# EAGLE board LCD _ serie (EAGLE 6.1)
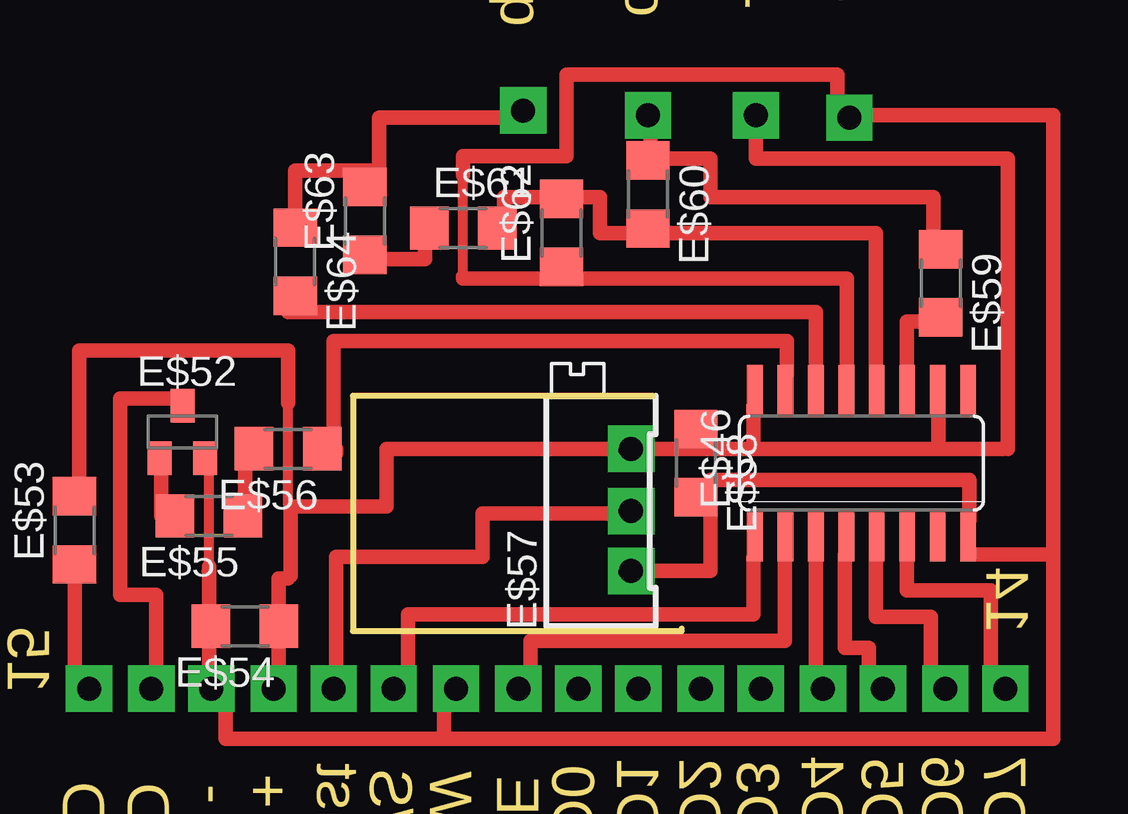
[diagram p0: board, top side]

Size 13.7 x 9.8 mm. Coordinates in mm from the lower left corner, seen from the top.
Outline: 12.5,9.8 0,9.8 0,0 13.7,0 13.7,0.1
Copper layers (1*16): Top 0.035mm / dielectric 1.5mm / Bottom 0.035mm
Design rules: minimum track width 10mil, minimum drill 24mil, track to track 8mil, track to pad 8mil, pad to pad 8mil, via to via 8mil, smd to smd 8mil, copper to edge 40mil, drill to drill 8mil, minimum pad ring 10mil, minimum via ring 8mil, stop-mask expansion 4mil, vias tented up to drill 0mil, thermal gap 10mil

## Footprints (pad centres in the part's own frame; a part is rotated, then mirrored left to right if it is on the bottom)
SO16 = smd 0.66 x 2.032: 1 -4.445,-3.073; 2 -3.175,-3.073; 3 -1.905,-3.073; 4 -0.635,-3.073; 5 0.635,-3.073; 6 1.905,-3.073; 7 3.175,-3.073; 8 4.445,-3.073; 9 4.445,3.073; 10 3.175,3.073; 11 1.905,3.073; 12 0.635,3.073; 13 -0.635,3.073; 14 -1.905,3.073; 15 -3.175,3.073; 16 -4.445,3.073
SOT23 = smd 1 x 1.4: 1 -0.95,-1.1; 2 0.95,-1.1; 3 0,1.1
R1206 = smd 1.6 x 1.803: 1 -1.422,0; 2 1.422,0
RTRIM64X = drill 0.61: 1 1.27,-2.54; 2 1.27,0; 3 1.27,2.54

## Placement (x,y rotation side)
E$46  595  [SO16]  21.2,7 0 top  (outside the outline)
E$52  [SOT23]  -7.1,8.3 0 top  (outside the outline)
E$53  33  [R1206]  -11.6,4.2 90 top  (outside the outline)
E$54  1uf  [R1206]  -4.5,0.2 180 top  (outside the outline)
E$55  1k  [R1206]  -6,4.8 180 top  (outside the outline)
E$56  1k  [R1206]  -2.7,7.6 180 top
E$57  [RTRIM64X]  10.1,5 0 top
E$58  100nf  [R1206]  14.3,7 270 top
E$59  470  [R1206]  24.5,14.5 270 top  (outside the outline)
E$60  1n4148  [R1206]  12.3,18.2 270 top  (outside the outline)
E$61  560pf  [R1206]  4.6,16.8 0 top  (outside the outline)
E$62  10k  [R1206]  8.7,16.6 90 top  (outside the outline)
E$63  1k  [R1206]  0.5,17.1 90 top  (outside the outline)
E$64  470  [R1206]  -2.4,15.4 270 top  (outside the outline)

## Library data of the parts
E$46 = 74xx-eu
E$52 = transistor
E$53-E$64 = ref-packages

## Tracks (layer width: path | path; a pad name or v marks a point on that pad's centre or on a via)
S$140  (via drill 1 pad 1.93)
  other vias: -5.9,-2.4
S$162
  Top 0.61: 3.8,-3.2 3.8,-4.5 | 3.8,-4.5 -5.3,-4.5 -5.3,-2.4 | 25.8,3.2 29.2,3.2 | 29.2,3.2 29.2,21.5 | 3.8,-4.5 29.2,-4.5 29.2,3.2
S$163  (via drill 1 pad 1.93)
  other vias: -11,-2.4
S$164  (via drill 1 pad 1.93)
  other vias: -8.4,-2.4
S$165  (via drill 1 pad 1.93)
  other vias: -3.3,-2.4
S$166  (via drill 1 pad 1.93)
  other vias: -0.8,-2.4
S$167  (via drill 1 pad 1.93)
  other vias: 1.7,-2.4
S$168  (via drill 1 pad 1.93)
  other vias: 4.3,-2.4
S$169  (via drill 1 pad 1.93)
  other vias: 6.9,-2.4
S$170  (via drill 1 pad 1.93)
  other vias: 9.4,-2.4
S$171  (via drill 1 pad 1.93)
  other vias: 11.9,-2.4
S$172  (via drill 1 pad 1.93)
  other vias: 14.5,-2.4
S$173  (via drill 1 pad 1.93)
  other vias: 17,-2.4
S$174  (via drill 1 pad 1.93)
  other vias: 19.6,-2.4
S$175  (via drill 1 pad 1.93)
  other vias: 22.1,-2.4
S$176  (via drill 1 pad 1.93)
  other vias: 24.7,-2.4
S$177  (via drill 1 pad 1.93)
  other vias: 27.2,-2.4
S$178
  Top 0.61: 23.1,3.2 23.1,1.7 26.6,1.7 26.6,-1.7
S$179
  Top 0.61: 21.8,3.4 21.8,0.6 24.1,0.6 24.1,-1.7
S$180
  Top 0.61: 21.5,-1.7 21.5,-0.7 20.5,-0.7 20.5,3.2
S$181
  Top 0.61: 19.3,-1.6 19.3,3.1
S$182
  Top 0.61: 7.4,-1.7 7.4,-0.4 18,-0.4 18,3.1
S$183
  Top 0.61: 2.3,-1.6 2.3,0.7 16.7,0.7 16.7,3.1
S$184
  Top 0.61: 25.7,7.6 27.1,7.6
S$185
  Top 0.61: -3,-2 -3.1,-2 -3.1,2.1
S$186
  Top 0.61: 16.7,9.4 16.7,7.6 | 16.7,7.6 24.4,7.6 | 24.4,7.6 24.4,9.3 | 24.4,7.6 25.6,7.6 | 16.7,7.6 1.4,7.6 1.4,5.2 -2.6,5.2 -2.6,2.3
S$187
  Top 0.61: -5.4,-1.9 -6,-1.9
S$188
  Top 0.61: -7.3,9.7 -9.7,9.7 -9.7,1.5 -8.2,1.5 -8.2,-1.6
S$189
  Top 0.61: -11.5,-1.9 -11.6,-1.9 -11.6,2.4
S$190
  Top 0.61: -3.1,2.2 -2.7,2.2
S$191
  Top 0.406: -2.7,5.3 -2.7,9.5
  Top 0.61: -11.3,6.2 -11.4,6.2 -11.4,11.7 -2.7,11.7 -2.7,9.5
S$192
  Top 0.61: -7.7,4.8 -8,4.8 -8,6.8
S$193
  Top 0.61: -4.5,7.3 -4.5,5.3
S$194
  Top 0.61: -0.7,7.4 -0.7,7.6
S$195
  Top 0.61: 18.1,10.7 18.1,12.1 15,12.1 14.9,12.1 -0.8,12.1 -0.8,8.2
S$196  (via drill 1 pad 1.93)
  other vias: 11.6,7.6
S$197  (via drill 1 pad 1.93)
  other vias: 11.6,5
S$198  (via drill 1 pad 1.93)
  other vias: 11.6,2.5
S$199
  Top 0.61: 11.3,4.9 5.4,4.9 5.4,3.1 -0.7,3.1 -0.7,-1.5
S$200
  Top 0.61: 25.7,4.6 25.7,6.3 14.9,6.3 14.9,2.5 12.4,2.5
S$201  (via drill 1 pad 1.93)
  other vias: 12.3,21.5
S$202  (via drill 1 pad 1.93)
  other vias: 16.8,21.5
S$203  (via drill 1 pad 1.93)
  other vias: 7.1,21.7
S$204
  Top 0.61: 6.8,13.3 19.3,13.3 19.3,10.7
S$205
  Top 0.61: 20.6,10.6 20.6,14.7 4.6,14.7
S$206
  Top 0.61: 24.8,12.9 23.1,12.9 23.1,10.6
S$207
  Top 0.61: 21.8,10.6 21.8,16.6 10.3,16.6 10.3,18.1 7.4,18.1
S$208
  Top 0.61: 6.7,13.3 -2.7,13.3
S$209
  Top 0.61: 8.3,18.1 6.3,18.1 6.3,17
S$210
  Top 0.61: 12,19.7 14.9,19.7 14.9,18.1 24.2,18.1 24.2,16.6
S$211
  Top 0.61: 27.3,7.6 27.3,19.7 16.8,19.7 16.8,21
S$212  (via drill 1 pad 1.93)
  other vias: 20.7,21.4
S$213
  Top 0.61: 21.3,21.5 29.2,21.5
S$214
  Top 0.61: 12.4,19.8 12.4,20.9
S$215
  Top 0.61: 4.6,19 4.6,19.8 8.9,19.8 8.9,23.2 20.2,23.2 20.2,21.9
S$216
  Top 0.61: 6.5,21.4 1.1,21.4 1.1,19.2 -2.4,19.2 -2.4,17.6
S$217
  Top 0.61: 0.4,15.5 3,15.5 3,16.9
S$218
  Top 0.61: -6.1,-1.8 -6,-1.8 -6,2.7
S$219
  Top 0.406: -6.1,2.5 -6,2.5 -6,6.7
S$220
  Top 0.406: 4.5,14.8 4.6,14.8 4.6,18.8

## Text on the board
Dimension: - | data | clk | +5v | 14 | 15 | - | + | E | D0 | D1 | D2 | D3 | D4 | D5 | D6 | D7 | R/S | R/W | const | +LED | -LED